# Altium PCB LED-SMD_4P-L1.2-W1.2_BR_2024-10-30.pcbdoc
Units mm, origin at the board's own origin, x right, y up, seen from the top; angles counter-clockwise.
Board outline 29.91 x 27.19 mm, 2 copper layers (Top Layer, Bottom Layer); 1 components, 0 nets, 4 pads, 0 vias.
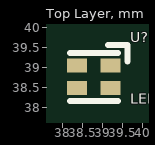
[diagram p0: Top Layer view]
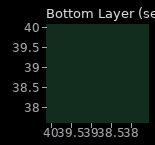
[diagram p1: Bottom Layer view, seen from below]

## Layer stack, top to bottom
Top Layer: signal copper (thickness not stored)
Dielectric: dielectric 0.32, FR-4, Dk 4.8
Bottom Layer: signal copper (thickness not stored)

## Board outline
55.311,25.4 25.4,25.4 25.4,52.594 55.311,52.594

## Components (designator, comment, footprint, x,y, rotation, side; value= is the part's Value field where it differs from the comment)
U? "LED-SMD_4P-L1.2-W1.2_BR" LED-SMD_4P-L1.2-W1.2_BR 38.895,38.87 r0 top

## Footprints (in the part's own frame and the unit in brackets; to place one, negate y for a bottom-side part, rotate by r counter-clockwise, add the part's x,y. Pads: shape width x height; smd on the part's side, far side on the other; paste and mask are expansions set on the pad)
LED-SMD_4P-L1.2-W1.2_BR [mm]
  rect 0.5x0.35 smd paste+0 mask+0.051: 1(0.295,-0.38) 2(0.295,0.19) 3(-0.535,0.19) 4(-0.535,-0.38)
  silkscreen extent -0.72,-0.69 0.72,0.69

## Nets (pads, with @x,y where several pads share a name; then routed paths per layer and width w, separated by ;. In a path a pad name is that pad's centre, name@x,y a point inside that pad or via, vN(x,y) a via of type N, cw(c..) or ccw(c..) an arc to the next point about the centre after c; other vN are vias at no path point)
pads on no net: U?.1 U?.2 U?.3 U?.4

## Silkscreen, mask and mechanical layers (free items; w line width, h text height)
Document:
  lines w0.003: 40.355,38.997 40.356,38.997